# EAGLE board Code LED Matrix (EAGLE 9.7.0)

Size 205.67 x 163.85 mm. Coordinates in mm from the lower left corner, seen from the top.
Outline: 0,0 205.67,0 205.67,163.85 0,163.85 0,0
Copper layers (1*16): Top 0.035mm / dielectric 1.5mm / Bottom 0.035mm
Design rules "default": minimum track width 6mil, minimum drill 0.35mm, track to track 6mil, track to pad 6mil, pad to pad 6mil, via to via 6mil, smd to smd 6mil, copper to edge 40mil, drill to drill 6mil, minimum pad ring 10mil, minimum via ring 8mil, stop-mask expansion 4mil, vias tented up to drill 0mil, thermal gap 10mil

## Footprints (pad centres in the part's own frame; a part is rotated, then mirrored left to right if it is on the bottom)
LEDRD254W60D565H860B = drill 0.981 pad 1.581: 1 -1.27,0; 2 1.27,0
RESAD1016W63L850D250B = drill 0.83 pad 1.43: 1 -5.08,0; 2 5.08,0
TO92 = drill 0.813 octagon: 1 -1.27,0; 2 0,1.905; 3 1.27,0
ARDUINO-UNO-R3-SHIELD = drill 1.016 pad 1.88: 3.3V 24.13,-2.54; 5V 24.13,0; A0 24.13,12.7; A1 24.13,15.24; A2 24.13,17.78; A3 24.13,20.32; A4 24.13,22.86; A5 24.13,25.4; AREF -24.13,-13.97; D2 -24.13,20.32; D3 -24.13,17.78; D4 -24.13,15.24; D5 -24.13,12.7; D6 -24.13,10.16; D7 -24.13,7.62; D8 -24.13,3.81; D9 -24.13,1.27; D10 -24.13,-1.27; D11 -24.13,-3.81; D12 -24.13,-6.35; D13 -24.13,-8.89; GND@0 24.13,2.54; GND@1 24.13,5.08; GND@2 -24.13,-11.43; IOREF 24.13,-7.62; NC 24.13,-10.16; RES 24.13,-5.08; RX -24.13,25.4; SCL -24.13,-19.05; SDA -24.13,-16.51; TX -24.13,22.86; VIN 24.13,7.62

## Placement (x,y rotation side)
D76  RED  [LEDRD254W60D565H860B]  136.64,85.6 180 top
D77  RED  [LEDRD254W60D565H860B]  151.57,85.68 180 top
D78  RED  [LEDRD254W60D565H860B]  166.05,85.49 180 top
D79  RED  [LEDRD254W60D565H860B]  181.78,85.26 180 top
D80  RED  [LEDRD254W60D565H860B]  198.3,85.11 180 top
D81  RED  [LEDRD254W60D565H860B]  136.1,69.33 180 top
D82  RED  [LEDRD254W60D565H860B]  151.45,69.45 180 top
D83  RED  [LEDRD254W60D565H860B]  166.76,69.38 180 top
D84  RED  [LEDRD254W60D565H860B]  182.28,69.2 180 top
D85  RED  [LEDRD254W60D565H860B]  199.02,68.98 180 top
D86  RED  [LEDRD254W60D565H860B]  136.1,54.12 180 top
D87  RED  [LEDRD254W60D565H860B]  151.69,54.18 180 top
D88  RED  [LEDRD254W60D565H860B]  167.23,54.33 180 top
D89  RED  [LEDRD254W60D565H860B]  182.59,54.11 180 top
D90  RED  [LEDRD254W60D565H860B]  199.29,54 180 top
D91  RED  [LEDRD254W60D565H860B]  136.18,38.96 180 top
D92  RED  [LEDRD254W60D565H860B]  151.82,38.95 180 top
D93  RED  [LEDRD254W60D565H860B]  167.54,38.98 180 top
D94  RED  [LEDRD254W60D565H860B]  182.86,38.83 180 top
D95  RED  [LEDRD254W60D565H860B]  199.61,38.51 180 top
D96  RED  [LEDRD254W60D565H860B]  136.18,23.77 180 top
D97  RED  [LEDRD254W60D565H860B]  151.8,23.77 180 top
D98  RED  [LEDRD254W60D565H860B]  167.47,23.54 180 top
D99  RED  [LEDRD254W60D565H860B]  183.02,23.54 180 top
D100  RED  [LEDRD254W60D565H860B]  199.42,23.47 180 top
R11  330  [RESAD1016W63L850D250B]  100.62,111.72 90 top
R12  330  [RESAD1016W63L850D250B]  107.04,111.71 90 top
R13  330  [RESAD1016W63L850D250B]  113.23,111.71 90 top
R14  330  [RESAD1016W63L850D250B]  119.86,111.71 90 top
R15  330  [RESAD1016W63L850D250B]  94.66,111.71 90 top
T11  NPN  [TO92]  134.56,6.1 270 top
T12  NPN  [TO92]  150.37,6.1 270 top
T13  NPN  [TO92]  166.01,6.3 270 top
T14  NPN  [TO92]  182.07,6.1 270 top
T15  NPN  [TO92]  198.13,6.3 270 top
U3  ARDUINO-UNO-R3-SHIELD  [ARDUINO-UNO-R3-SHIELD]  47.88,134.01 270 top

## Library data of the parts
D76-D100 = Tinkercad; CATEGORY: Opto-Electronic; SUB-CATEGORY: LED; VALUE: LED_RED
R11-R15 U3 = Tinkercad
T11-T15 = Tinkercad; CATEGORY: Transistor; SUB-CATEGORY: BJT; TYPE: NPN

## Nets
D76_A: D76.1 D77.1 D78.1 D79.1 D80.1 R14.1
D81_A: D81.1 D82.1 D83.1 D84.1 D85.1 R13.1
D86_A: D86.1 D87.1 D88.1 D89.1 D90.1 R12.1
D91_A: D91.1 D92.1 D93.1 D94.1 D95.1 R11.1
D96_A: D96.1 D97.1 D98.1 D99.1 D100.1 R15.1
D96_C: D76.2 D81.2 D86.2 D91.2 D96.2 T11.1
D97_C: D77.2 D82.2 D87.2 D92.2 D97.2 T12.1
D98_C: D78.2 D83.2 D88.2 D93.2 D98.2 T13.1
D99_C: D79.2 D84.2 D89.2 D94.2 D99.2 T14.1
D100_C: D80.2 D85.2 D90.2 D95.2 D100.2 T15.1
U3_A1: T11.2 U3.A1
U3_A2: T12.2 U3.A2
U3_A3: T13.2 U3.A3
U3_A4: T14.2 U3.A4
U3_A5: T15.2 U3.A5
U3_D2: R15.2 U3.D2
U3_D3: R11.2 U3.D3
U3_D4: R12.2 U3.D4
U3_D5: R13.2 U3.D5
U3_D6: R14.2 U3.D6
U3_GND: T11.3 T12.3 T13.3 T14.3 T15.3 U3.GND@0 U3.GND@1 U3.GND@2

## Tracks (layer width: path | path; a pad name or v marks a point on that pad's centre or on a via)
D76_A  (5 unrouted)
D81_A  (5 unrouted)
D86_A  (5 unrouted)
D91_A  (5 unrouted)
D96_A  (5 unrouted)
D96_C  (5 unrouted)
D97_C  (5 unrouted)
D98_C  (5 unrouted)
D99_C  (5 unrouted)
D100_C  (5 unrouted)
U3_A1  (1 unrouted)
U3_A2  (1 unrouted)
U3_A3  (1 unrouted)
U3_A4  (1 unrouted)
U3_A5  (1 unrouted)
U3_D2  (1 unrouted)
U3_D3  (1 unrouted)
U3_D4  (1 unrouted)
U3_D5  (1 unrouted)
U3_D6  (1 unrouted)
U3_GND  (7 unrouted)